# Altium PCB Copy of SoM.PcbDoc (part 6 of 8)
Units mm, origin at the board's own origin, x right, y up, seen from the top; angles counter-clockwise.
Board outline 69.6 x 50 mm, 10 copper layers ([1] Signal HS-H, [2] GND, [3] Signal HS-V, [4] Signal H, [5] GND, [6] POWER, [7] Signal V, [8] Signal HS-H, [9] GND, [10] Signal HS-V), stack 1.146 mm thick; 537 components, 516 nets, 5689 pads, 981 vias.
Unrouted connection lines stored in the file: 963.
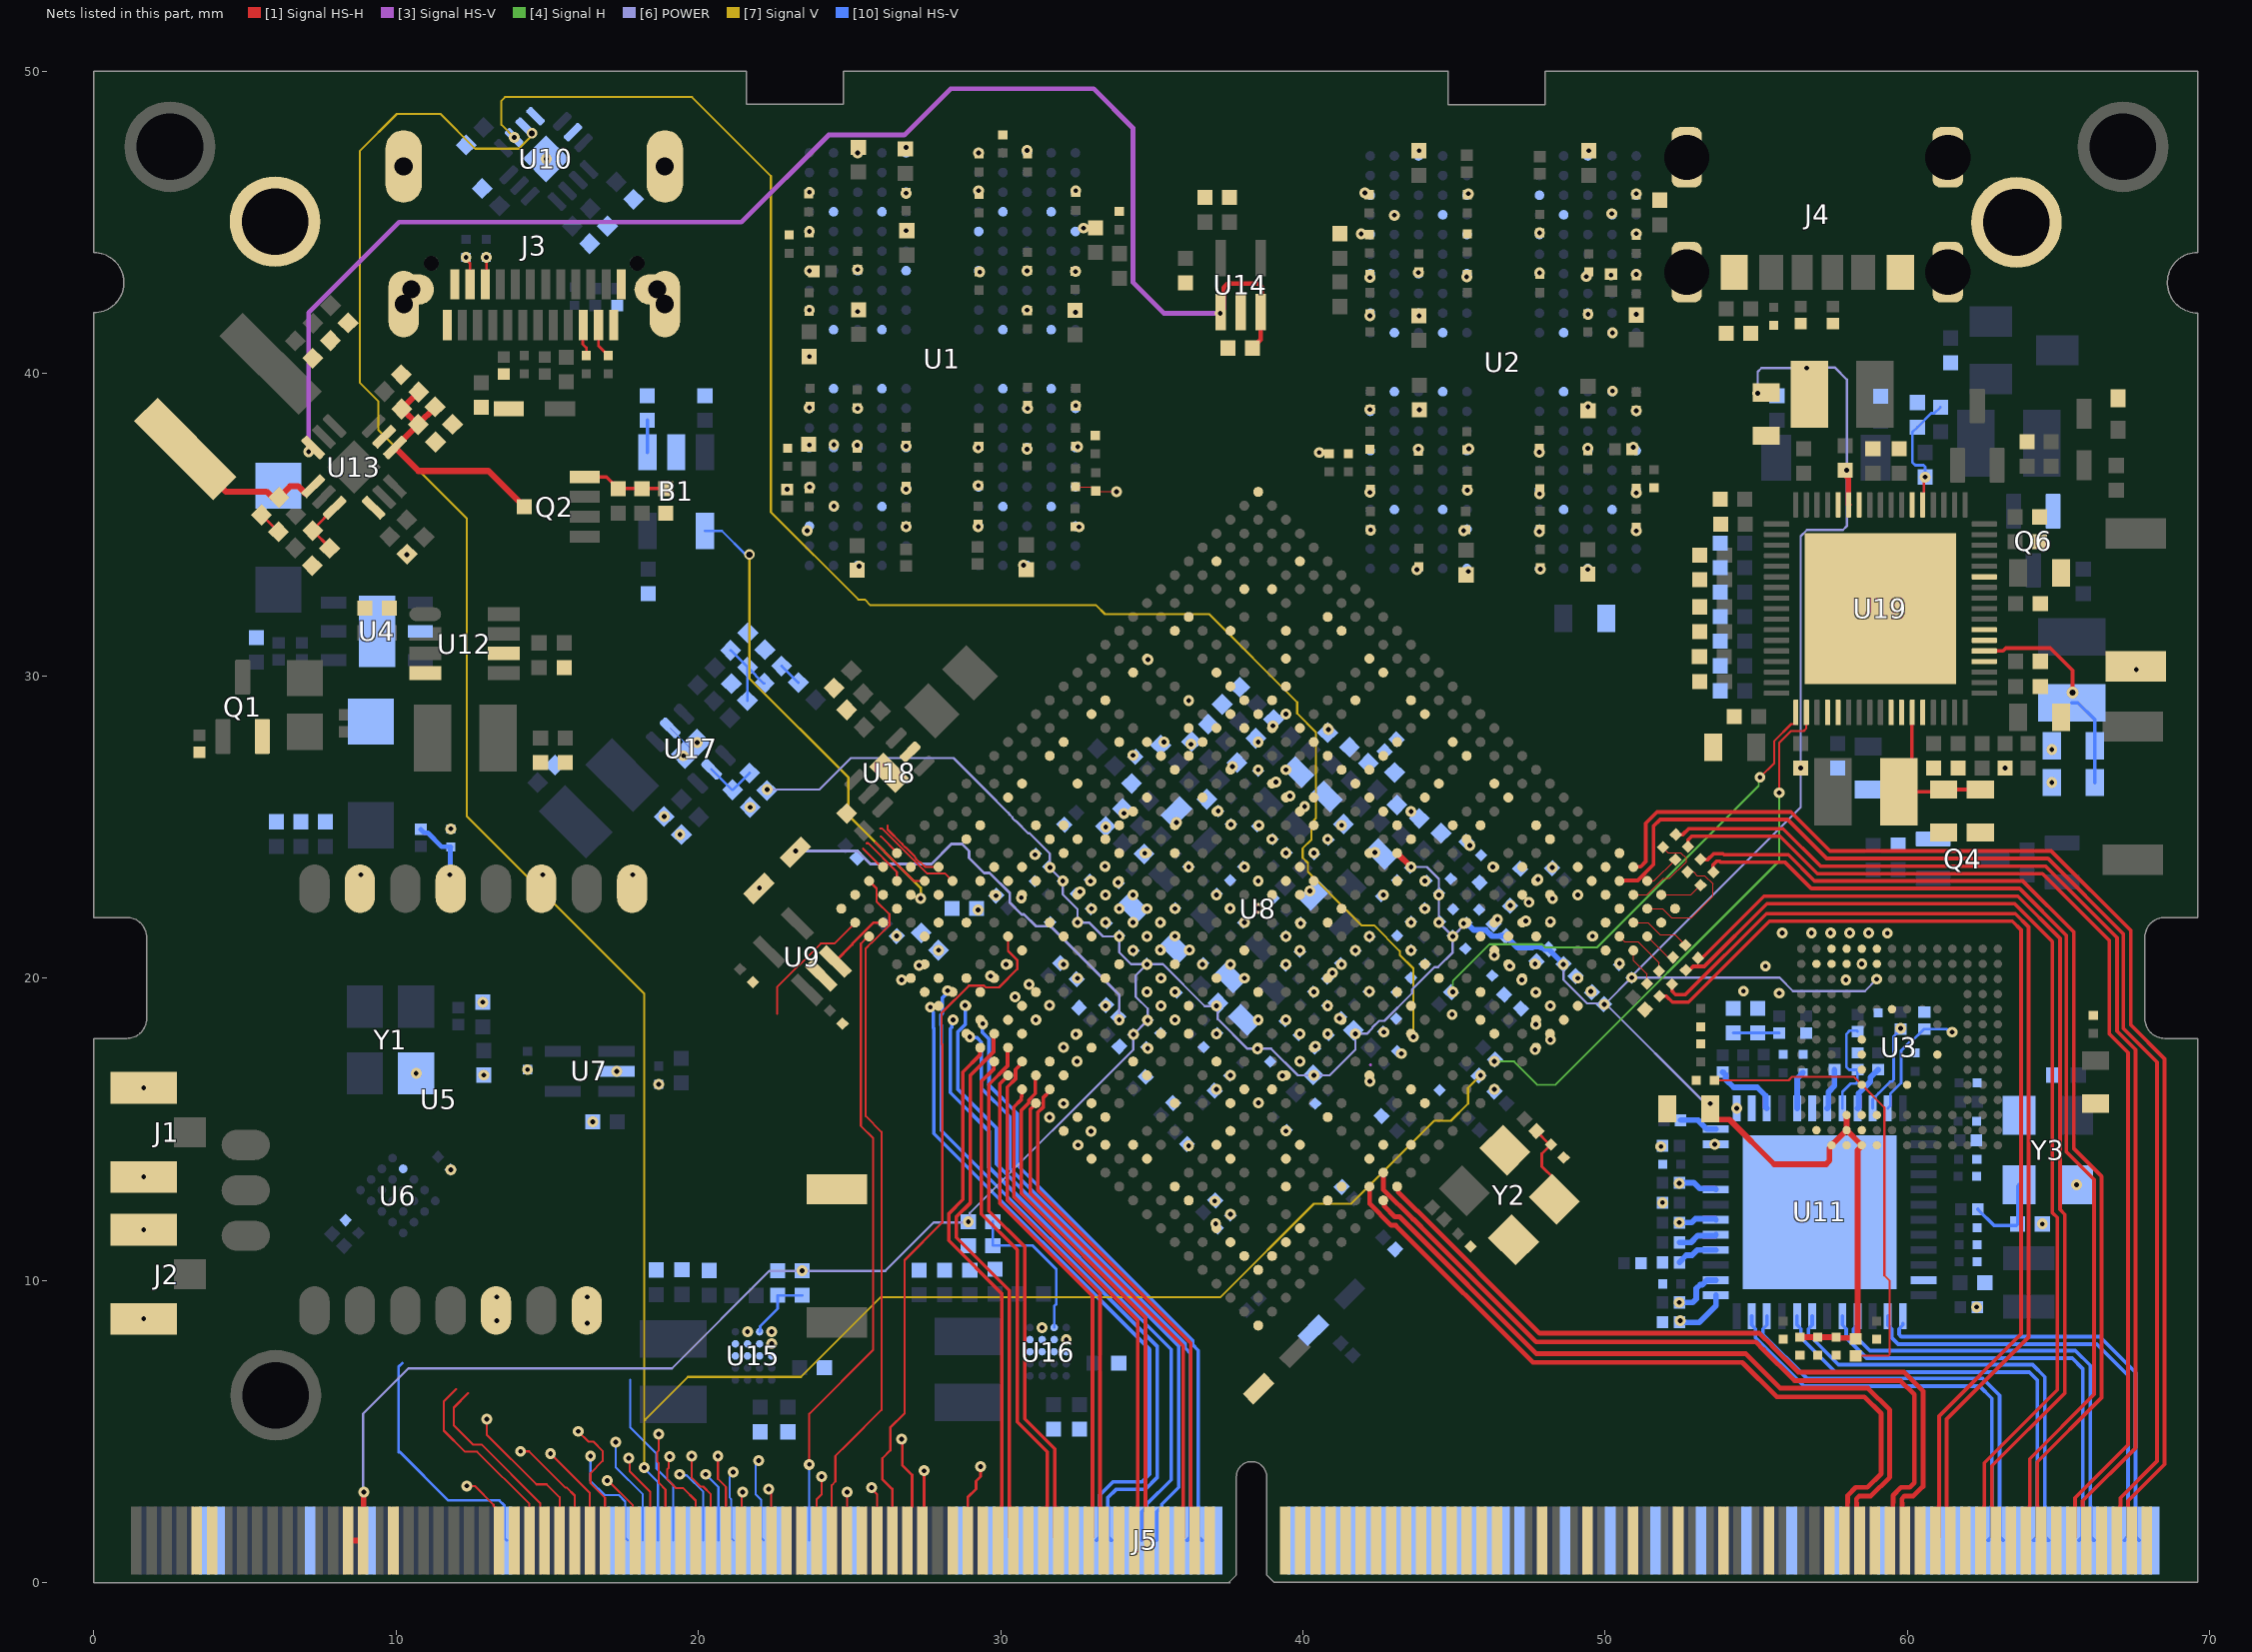
[diagram p11: the nets of this part, all layers, seen from the top]

## Via types
v1: diameter 0.36, hole 0.16, [1] Signal HS-H to [10] Signal HS-V, 895 vias
v2: diameter 0.35, hole 0.16, [1] Signal HS-H to [10] Signal HS-V, 22 vias
v3: diameter 0.4, hole 0.2, [1] Signal HS-H to [10] Signal HS-V, 13 vias
v4: diameter 0.35, hole 0.15, [1] Signal HS-H to [10] Signal HS-V, 12 vias
v5: diameter 0.35, hole 0.15, [1] Signal HS-H to [8] Signal HS-H, 11 vias
v6: diameter 0.35, hole 0.2, [1] Signal HS-H to [8] Signal HS-H, 6 vias
v7: diameter 0.5, hole 0.25, [1] Signal HS-H to [10] Signal HS-V, 6 vias
v8: diameter 0.35, hole 0.15, [3] Signal HS-V to [10] Signal HS-V, 6 vias
v9: diameter 0.35, hole 0.2, [3] Signal HS-V to [10] Signal HS-V, 4 vias
v10: diameter 0.36, hole 0.16, [1] Signal HS-H to [3] Signal HS-V, 4 vias
v11: diameter 0.5, hole 0.25, [1] Signal HS-H to [8] Signal HS-H, 2 vias

## Nets (pads, with @x,y where several pads share a name; then routed paths per layer and width w, separated by ;. In a path a pad name is that pad's centre, name@x,y a point inside that pad or via, vN(x,y) a via of type N, cw(c..) or ccw(c..) an arc to the next point about the centre after c; other vN are vias at no path point) (continued)
EDP_AVDD_1V8: C105.2 C106.2 C107.2 C188.2 C193.2 C203.2 C204.2 C205.2 C208.2 C211.2 C214.2 C217.2 C219.2 C220.2 C221.2 C222.2 C225.2 C227.2 C318.2 FB7.2 FB9.1 FB10.1 J5.29 J5.31 L8.2 R9.2 R42.2 R43.2 R44.2 R45.2 R105.2 R106.2 R109.1 R124.2 R126.2 U3.C6 U3.M4 U3.N4 U3.P3 U3.P5 U8.AA18 U8.AA21 U8.AB8 U8.AB12 U8.AB14 U8.AC10 U8.AD16 U8.J19 U8.J20 U8.J22 U8.J24 U8.K23 U8.K24 U8.U24 U8.Y24 U19.63 | length 139.2
  [1] Signal HS-H w0.192: J5.29@8.415,1.397 J5.31@8.915,1.397 8.928,1.41 8.928,2.984 v1(8.941,2.997) ; U8.J19@43.116,24.135 v1(43.576,23.675) ; C105.2@53.467,15.672 53.467,15.522 53.671,15.318 54.11,15.318 55.585,13.843 57.302,13.843 57.415,13.956 57.415,14.376 57.484,14.445 U3.P3@57.484,14.469 U3.N4@57.984,14.969 ; C222.2@56.439,8.123 C107.2@57.023,8.123 C106.2@57.633,8.123 57.661,8.095 58.255,8.095 R9.2@58.282,8.067 58.344,8.129 58.344,14.305 58.484,14.445 U3.P5@58.484,14.469 U3.N4@57.984,14.969 ; U3.M4@57.984,15.469 U3.N4@57.984,14.969 ; v1(57.988,36.805) 57.988,36.601 58.04,36.549 58.04,35.67 U19.63@58.052,35.659 ; v1(58.979,19.964) U3.C6@58.984,19.969
  [6] POWER w0.077: v1(8.941,2.997) 8.915,3.023 8.915,5.588 10.414,7.087 19.126,7.087 22.355,10.316 v1(23.432,10.316) 26.191,10.316 27.788,11.913 28.905,11.913 v1(28.931,11.938) 28.985,11.992 28.985,12.227 34.392,17.634 34.392,18.133 34.861,18.602 v1(34.865,18.602) 34.865,18.988 34.471,19.383 34.471,20.085 v1(34.843,20.458) ; v1(22.276,26.238) 24.003,26.238 25.044,27.28 26.975,27.28 28.441,27.28 29.483,26.238 30.257,25.465 30.278,25.443 30.278,25.424 30.385,25.317 ccw(c30.709,25.502) 30.524,25.178 30.912,24.79 30.956,24.79 31.632,24.115 v1(31.632,23.664) ; v1@31.618,23.65 32.056,23.212 v1(32.056,23.21) 32.056,22.767 32.545,22.279 v1(32.545,21.836) 32.926,21.836 33.386,21.377 v1(33.924,21.377) 33.924,20.85 34.316,20.458 v1(34.843,20.458) ; v1@37.132,19.07 36.754,19.07 36.754,19.074 35.37,20.458 v1(34.843,20.458) ; v1@37.186,19.016 37.186,18.644 38.167,17.662 v1(38.497,17.662) 38.95,17.662 39.832,16.781 v1(40.359,16.781) 40.885,16.781 41.737,17.633 v1(41.737,18.159) 42.112,18.159 42.299,18.347 42.299,18.366 42.518,18.584 42.689,18.584 43.609,19.504 43.609,19.625 44.346,20.362 44.467,20.362 44.955,20.85 v1(44.955,21.377) ; v1(43.576,23.675) 44.103,23.675 44.495,23.283 v1(44.495,22.756) v1(44.495,21.836) v1(44.955,21.377) ; v1@45.414,21.836 v1(44.955,21.377) ; v1(48.616,20.447) 48.616,19.947 49.397,19.166 v1@49.951,19.166 ; v1(49.962,19.126) 49.974,19.126 v1@50.006,19.158 ; v1@50.851,20.041 56.464,25.654 v1(56.464,26.949) 56.464,34.62 56.667,34.823 57.861,34.823 57.988,34.95 57.988,36.754 57.963,36.779 v1(57.988,36.805) 57.988,39.802 57.588,40.202 56.686,40.202 v1(56.667,40.183) 55.169,40.183 55.042,40.056 v1(55.042,39.345) ; v1(53.467,15.85) 53.413,15.904 53.26,15.904 v1@50.006,19.158 ; v1(58.979,19.964) 58.585,19.571 56.209,19.571 55.765,20.015 v1(50.876,20.015) 50.863,20.015 v1@50.006,19.158
  [10] Signal HS-V w0.192: C219.2@45.406,21.835 45.653,21.588 46.051,21.588 46.254,21.385 R43.2@46.498,21.385 ; R43.2@46.498,21.392 R43.2@46.705,21.392 47.092,21.006 47.585,21.006 47.632,21.053 47.817,21.053 47.864,21.006 47.939,21.006 47.988,20.957 48.121,20.957 R45.2@48.128,20.95 48.133,20.95 48.616,20.467 R44.2@48.621,20.467 R44.2@48.614,20.46
  other v1: 34.392,18.137 37.141,19.079 45.313,21.811
EDP_TX0_N: C196.2 J5.249 | length 36.5
  [1] Signal HS-H w0.122: C196.2@52.739,24.342 52.739,24.468 52.738,24.469 52.738,24.571 52.86,24.693 55.774,24.693 57.018,23.449 58.323,23.449 64.461,23.449 66.675,21.234 66.675,18.146 67.289,17.532 67.289,4.558 65.54,2.809 65.54,2.532 65.529,2.521 65.529,1.511 J5.249@65.415,1.397
EDP_TX0_P: C195.2 J5.251 | length 37.1
  [1] Signal HS-H w0.122: C195.2@52.333,24.749 52.459,24.749 52.46,24.747 52.561,24.747 52.757,24.942 55.877,24.942 57.122,23.698 58.572,23.698 64.564,23.698 66.925,21.337 66.925,18.249 67.539,17.635 67.539,4.454 65.79,2.705 65.79,2.532 65.801,2.521 65.801,1.511 J5.251@65.915,1.397
EDP_TX1_N: C198.2 J5.243 | length 34.3
  [1] Signal HS-H w0.122: C198.2@53.581,23.501 53.581,23.627 53.565,23.642 53.565,23.744 53.687,23.866 53.788,23.866 53.826,23.828 55.953,23.828 56.815,22.966 57.84,22.966 63.7,22.966 65.253,21.414 65.253,14.252 66.169,13.337 66.169,6.225 64.04,4.096 64.04,2.532 64.029,2.521 64.029,1.511 J5.243@63.956,1.438
EDP_TX1_P: C197.2 J5.245 | length 35
  [1] Signal HS-H w0.122: C197.2@53.146,23.936 53.271,23.936 53.287,23.92 53.388,23.92 53.584,24.115 53.892,24.115 53.929,24.078 56.056,24.078 56.918,23.216 58.09,23.216 63.803,23.216 65.502,21.517 65.502,14.356 66.418,13.44 66.418,6.121 64.29,3.993 64.29,2.532 64.301,2.521 64.301,1.511 J5.245@64.415,1.397
EDP_TX2_N: C200.2 J5.237 | length 34.5
  [1] Signal HS-H w0.123: C200.2@52.663,20.26 52.789,20.26 52.911,20.383 53.276,20.383 55.351,22.458 57.332,22.458 63.542,22.458 64.79,21.209 64.79,12.237 64.949,12.079 64.949,6.374 62.54,3.965 62.54,2.533 62.529,2.521 62.529,1.511 J5.237@62.415,1.397
EDP_TX2_P: C199.2 J5.239 | length 34.4
  [1] Signal HS-H w0.123: C199.2@53.07,20.667 53.11,20.667 53.195,20.667 53.24,20.712 53.252,20.712 54.954,22.414 55.248,22.708 57.582,22.708 63.645,22.708 65.04,21.312 65.04,12.341 65.199,12.182 65.199,6.271 62.79,3.862 62.79,2.533 62.801,2.521 62.801,1.511 J5.239@62.915,1.397
EDP_TX3_N: C202.2 J5.231 | length 34.6
  [1] Signal HS-H w0.122: C202.2@51.8,19.397 51.925,19.397 51.927,19.398 52.028,19.398 52.223,19.203 52.749,19.203 55.431,21.885 63.462,21.885 63.756,21.591 63.756,8.228 61.04,5.513 61.04,2.532 61.029,2.521 61.029,1.511 J5.231@60.915,1.397
EDP_TX3_P: C201.2 J5.233 | length 34.8
  [1] Signal HS-H w0.122: C201.2@52.206,19.803 52.206,19.677 52.204,19.676 52.204,19.575 52.327,19.452 52.646,19.452 55.328,22.134 63.565,22.134 64.005,21.694 64.005,8.125 61.29,5.41 61.29,2.532 61.301,2.521 61.301,1.511 J5.233@61.415,1.397
EDPAUX_N: J5.257 U8.A28 | length 40.8
  [1] Signal HS-H w0.122: U8.A28@50.93,23.675 50.938,23.683 51.17,23.683 51.341,23.854 51.341,25.126 51.713,25.497 56.139,25.497 57.429,24.206 64.746,24.206 67.386,21.566 67.386,18.44 68.5,17.326 68.5,3.916 67.29,2.705 67.29,2.532 67.301,2.521 67.301,1.511 J5.257@67.415,1.397
EDPAUX_P: J5.255 U8.B28 | length 40.9
  [1] Signal HS-H w0.122: U8.B28@50.47,23.215 50.488,23.233 51.073,23.233 51.591,23.751 51.591,25.022 51.816,25.248 56.035,25.248 57.326,23.957 64.643,23.957 67.137,21.463 67.137,18.337 68.251,17.223 68.251,4.019 67.04,2.809 67.04,2.532 67.029,2.521 67.029,1.511 J5.255@66.915,1.397
EFUSE_VQPS_EN_H: U8.AK3 U9.3 | length 2.1
  [1] Signal HS-H w0.09: U9.3@24.535,20.549 25.094,21.109 25.094,21.131 25.799,21.836 U8.AK3@26.11,21.836
EMMC_CLKO: R25.2 U3.M5
EMMC_CMD: U3.M6 U8.J31
EMMC_D0: U3.A3 U8.J28
  other v1: 47.244,19.939 56.82,21.488
EMMC_D1: U3.A4 U8.J29
  other v1: 47.701,19.533 58.08,21.488
EMMC_D2: U3.A5 U8.J30
  other v1: 48.184,19.075 58.709,21.488
EMMC_D3: U3.B2 U8.J25
  other v2: 44.933,18.796
  other v4: 55.296,20.396
EMMC_D4: U3.B3 U8.J26
  other v1: 46.33,20.752 55.856,21.49
EMMC_D5: U3.B4 U8.J27
  other v1: 46.838,20.396 57.45,21.488
EMMC_D6: U3.B5 U8.L31
  other v2: 47.676,17.628 58.484,20.469
EMMC_D7: U3.B6 U8.K30
  other v2: 47.701,18.466 59.334,21.483
EMMC_RSTN: C99.2 R9.1 U3.K5 | length 15.5
  [1] Signal HS-H w0.07: C99.2@53.612,16.619 56.065,16.619 56.185,16.739 58.214,16.739 U3.K5@58.484,16.469 59.233,15.72 59.233,10.16 59.411,9.982 59.411,7.548 59.37,7.507 R9.1@58.282,7.507
EMMC_STRB: U3.H5 U8.K31
  other v2: 48.184,17.958
EN_SYR838: C291.2 R105.1 U15.A2 | length 2.3
  [10] Signal HS-V w0.09: U15.A2@22.028,8.301 22.049,8.322 22.049,8.486 22.626,9.063 C291.2@22.626,9.504 R105.1@23.432,9.504
EN_SYR8382: C299.2 R106.1 U16.A2 | length 5.2
  [10] Signal HS-V w0.09: R106.1@29.743,11.938 C299.2@29.743,11.151 31.064,11.151 31.842,10.373 31.842,9.217 31.772,9.147 U16.A2@31.772,8.439
G2_U1: R1.1 U1.G2
  other v1: 22.936,36.17 24.486,37.643
G2_U2: R5.1 U2.G2
  other v1: 50.19,43.256
G12_U8D: FB6.1 U8.G12
  other v1: 40.843,28.219
G15_U8D: R20.2 U8.G15
GND: B1.2 C1.1 C2.1 C3.1 C4.1 C5.1 C6.1 C7.1 C8.1 C9.1 C10.1 C11.1 C12.1 C13.1 C14.1 C15.1 C16.1 C17.1 C18.1 C19.1 C20.1 C21.1 C22.1 C23.1 C24.1 C25.1 C26.1 C27.1 C28.1 C29.1 C30.1 C31.1 C32.1 C33.1 C34.1 C35.1 C36.1 C37.1 C38.1 C39.1 C40.1 C41.1 C42.1 C43.1 C44.1 C45.1 C46.1 C47.1 C48.1 C49.1 C50.1 C51.1 C52.1 C53.1 C54.1 C55.1 C56.1 C57.1 C58.1 C59.1 C60.1 C61.1 C62.1 C63.1 C64.1 C65.1 C66.1 C67.1 C68.1 C69.1 C70.1 C71.1 C72.1 C73.1 C74.1 C75.1 C76.1 C77.1 C78.1 C79.1 C80.1 C81.1 C82.1 C83.1 C84.1 C85.1 C86.1 C87.1 C88.1 C89.1 C90.1 C91.2 C92.2 C93.1 C94.1 C95.1 C96.2 C97.1 C98.1 C99.1 C100.1 C101.1 C102.1 C103.1 C104.1 C105.1 C106.1 C107.1 C108.1 C109.1 C110.1 C111.1 C112.1 C113.1 C114.1 C116.1 C117.1 C118.1 C119.1 C120.1 C121.1 C122.1 C123.1 C124.1 C125.1 C126.1 C127.1 C128.1 C129.1 C130.1 C131.1 C132.1 C133.1 C134.1 C135.1 C136.1 C137.1 C138.1 C139.1 C140.1 C141.1 C142.1 C143.1 C144.1 C145.1 C146.1 C154.1 C155.1 C156.1 C157.1 C158.1 C159.1 C160.1 C161.1 C162.1 C163.1 C164.1 C165.1 C166.1 C167.1 C168.1 C169.1 C170.1 C171.1 C172.1 C173.1 C174.1 C175.1 C176.1 C177.1 C178.1 C179.1 C180.1 C181.1 C182.1 C183.1 C184.1 C185.1 C186.1 C187.1 C188.1 C189.1 C190.1 C191.1 C192.1 C193.1 C194.1 C203.1 C204.1 C205.1 C206.1 C207.1 C208.1 C209.1 C210.1 C211.1 C212.1 C213.1 C214.1 C215.1 C216.1 C217.1 C218.1 C219.1 C220.1 C221.1 C222.1 C223.1 C224.1 C225.1 C226.1 C227.1 C228.1 C229.1 C230.1 C231.1 C232.1 C233.2 C234.1 C235.1 C236.1 C241.1 C243.1 C245.1 C246.1 C247.1 C248.1 C249.1 C250.1 C251.1 C252.1 C253.1 C254.1 C255.1 C256.1 C257.1 C258.1 C259.1 C260.1 C261.1 C262.1 C263.1 C264.1 C265.1 C266.1 C267.1 C268.1 C270.1 C271.1 C272.1 C273.1 C274.1 C275.1 C277.1 C278.1 C279.1 C280.1 C281.1 C282.1 C283.1 C284.1 C285.1 C286.1 C287.1 C288.1 C289.1 C290.1 C291.1 C292.1 C293.1 C294.1 C295.1 C296.1 C297.1 C298.1 C299.1 C300.1 C301.1 C302.1 C303.1 C304.1 C305.1 C306.1 C307.1 C308.1 C309.1 C310.1 C311.1 C312.1 C313.1 C314.1 C315.1 C316.1 C317.1 C318.1 C319.1 C320.1 C322.1 C323.1 C324.1 C325.1 C326.1 C327.1 C328.2 C329.1 C330.1 C331.1 C332.1 C333.1 C334.1 C335.1 C336.1 C337.1 C338.1 C339.1 C340.1 C341.2 C342.1 C343.2 C344.1 C345.1 C346.1 C347.1 D1.A D2.A D3.A D4.A D7.A J1.1 J1.3 J2.1 J2.3 J3.A1 J3.A12 J3.B1 J3.B12 J3.S1 J3.S2 J3.S3 J3.S4 J4.A12 J4.B12 J4.E1 J4.E2 J4.E3 J4.E4 J5.9 J5.10 J5.11 J5.12 J5.24 J5.32 J5.35 J5.51 J5.64 J5.65 J5.74 J5.83 J5.86 J5.87 J5.92 J5.96 J5.109 J5.110 J5.113 J5.114 J5.119 J5.120 J5.125 J5.126 J5.131 J5.132 J5.137 J5.138 J5.143 J5.144 J5.146 J5.149 J5.152 J5.155 J5.158 J5.161 J5.164 J5.167 J5.170 J5.173 J5.176 J5.179 J5.182 J5.185 J5.188 J5.191 J5.194 J5.197 J5.200 J5.203 J5.206 J5.209 J5.212 J5.217 J5.218 J5.223 J5.224 J5.229 J5.230 J5.235 J5.236 J5.241 J5.242 J5.247 J5.248 J5.253 J5.254 J5.259 J5.260 pad.1@6,45.025 pad.1@63.6,45 Q1.2 Q4.2 Q6.2 R2.1 R6.1 R13.2 R17.1 R18.2 R19.1 R20.1 R26.1 R28.2 R29.2 R30.1 R31.2 R32.2 R33.2 R34.2 R35.2 R37.2 R39.2 R40.2 R41.2 R52.1 R53.1 R64.2 R65.1 R66.1 R75.1 R81.1 R83.1 R85.1 R87.1 R95.1 R99.1 R101.1 R102.1 R103.1 R114.1 R115.1 R116.1 R120.1 R121.1 R131.1 SW2.1 SW3.1 U1.A3 U1.A10 U1.AB3 U1.AB5 U1.AB8 U1.AB10 U1.C1 U1.C5 U1.C8 U1.C12 U1.D2 U1.D4 U1.D9 U1.D11 U1.E1 U1.E5 U1.E8 U1.E12 U1.G1 U1.G3 U1.G5 U1.G8 U1.G10 U1.G12 U1.J1 U1.J3 U1.J10 U1.J12 U1.K2 U1.K4 U1.K9 U1.K11 U1.N2 U1.N4 U1.N9 U1.N11 U1.P1 U1.P3 U1.P10 U1.P12 U1.T1 U1.T3 U1.T5 U1.T8 U1.T10 U1.T12 U1.V1 U1.V5 U1.V8 U1.V12 U1.W2 U1.W4 U1.W9 U1.W11 U1.Y1 U1.Y5 U1.Y8 U1.Y12 U2.A3 U2.A10 U2.AB3 U2.AB5 U2.AB8 U2.AB10 U2.C1 U2.C5 U2.C8 U2.C12 U2.D2 U2.D4 U2.D9 U2.D11 U2.E1 U2.E5 U2.E8 U2.E12 U2.G1 U2.G3 U2.G5 U2.G8 U2.G10 U2.G12 U2.J1 U2.J3 U2.J10 U2.J12 U2.K2 U2.K4 U2.K9 U2.K11 U2.N2 U2.N4 U2.N9 U2.N11 U2.P1 U2.P3 U2.P10 U2.P12 U2.T1 U2.T3 U2.T5 U2.T8 U2.T10 U2.T12 U2.V1 U2.V5 U2.V8 U2.V12 U2.W2 U2.W4 U2.W9 U2.W11 U2.Y1 U2.Y5 U2.Y8 U2.Y12 U3.A6 U3.C4 U3.E7 U3.G5 U3.H10 U3.J5 U3.K8 U3.N2 U3.N5 U3.P4 U3.P6 U4.2 U4.7 U5.5 U5.7 U5.8 U5.10 U5.14 U6.D1 U7.2 U8.A1 U8.A27 U8.A31 U8.AA3 U8.AA5 U8.AA9 U8.AA10 U8.AA11 U8.AA12 U8.AA13 U8.AA14 U8.AA15 U8.AA23 U8.AA26 U8.AA29 U8.AB9 U8.AB10 U8.AB11 U8.AB13 U8.AB15 U8.AB16 U8.AB17 U8.AB19 U8.AB23 U8.AC3 U8.AC11 U8.AC13 U8.AC15 U8.AC16 U8.AC17 U8.AC18 U8.AC20 U8.AC21 U8.AC22 U8.AC23 U8.AC25 U8.AC26 U8.AC29 U8.AD3 U8.AD5 U8.AD10 U8.AD13 U8.AD17 U8.AD21 U8.AD22 U8.AD26 U8.AD29 U8.AE11 U8.AE12 U8.AE14 U8.AE17 U8.AE23 U8.AE27 U8.AF9 U8.AF17 U8.AF18 U8.AF20 U8.AF23 U8.AF24 U8.AF29 U8.AG2 U8.AG29 U8.AH29 U8.AJ5 U8.AJ6 U8.AJ8 U8.AJ9 U8.AJ11 U8.AJ12 U8.AJ14 U8.AJ15 U8.AJ17 U8.AJ18 U8.AJ20 U8.AJ21 U8.AJ23 U8.AJ24 U8.AJ26 U8.AJ27 U8.AJ28 U8.AJ29 U8.AL1 U8.AL31 U8.B5 U8.B31 U8.C8 U8.C9 U8.C11 U8.C12 U8.C14 U8.C15 U8.C17 U8.C18 U8.C20 U8.C21 U8.C23 U8.C24 U8.C26 U8.C28 U8.C29 U8.D5 U8.D29 U8.E2 U8.E4 U8.E7 U8.E12 U8.E15 U8.E18 U8.E21 U8.E24 U8.E31 U8.F8 U8.F15 U8.F18 U8.F20 U8.F21 U8.G5 U8.G9 U8.G18 U8.G27 U8.H3 U8.H9 U8.H10 U8.H11 U8.H12 U8.H13 U8.H15 U8.H16 U8.H17 U8.H18 U8.H19 U8.H26 U8.J3 U8.J6 U8.J7 U8.J8 U8.J9 U8.J10 U8.J21 U8.K8 U8.K9 U8.K10 U8.K12 U8.K14 U8.K16 U8.K18 U8.K20 U8.K22 U8.L3 U8.L6 U8.L8 U8.L11 U8.L12 U8.L13 U8.L14 U8.L15 U8.L16 U8.L20 U8.L22 U8.L27 U8.M3 U8.M8 U8.M10 U8.M16 U8.M23 U8.N8 U8.N13 U8.N14 U8.N15 U8.N16 U8.N17 U8.N19 U8.N21 U8.P3 U8.P6 U8.P7 U8.P8 U8.P10 U8.P11 U8.P12 U8.P16 U8.P17 U8.P19 U8.P21 U8.R3 U8.R5 U8.R6 U8.R14 U8.R15 U8.R16 U8.R18 U8.R21 U8.R23 U8.T8 U8.T10 U8.T16 U8.T18 U8.T19 U8.T21 U8.U3 U8.U8 U8.U11 U8.U12 U8.U14 U8.U15 U8.U16 U8.U19 U8.U21 U8.U22 U8.U23 U8.U29 U8.V3 U8.V5 U8.V8 U8.V10 U8.V17 U8.V23 U8.W8 U8.W9 U8.W13 U8.W17 U8.W18 U8.W19 U8.W21 U8.W22 U8.W23 U8.W30 U8.Y3 U8.Y9 U8.Y10 U8.Y11 U8.Y12 U8.Y13 U8.Y14 U8.Y15 U8.Y16 U8.Y17 U8.Y20 U8.Y23 U8.Y29 U9.2 U10.9 U10.15 U11.47 U11.49 U12.4 U12.6 U13.2 U13.10 U14.2 U15.B2 U15.B3 U15.B4 U15.C1 U15.C2 U15.C3 U15.C4 U16.B2 U16.B3 U16.B4 U16.C1 U16.C2 U16.C3 U16.C4 U17.5 U17.7 U18.5 U18.7 U19.21 U19.22 U19.27 U19.28 U19.30 U19.38 U19.40 U19.41 U19.46 U19.57 U19.62 U19.64 U19.69 Y1.2 Y2.2 Y2.4 Y3.2 Y3.4 | length 2.4
  [1] Signal HS-H w0.037: C42.1@32.475,36.251 33.013,36.251 C45.1@33.148,36.116 33.17,36.093 v1(33.833,36.093)
  [10] Signal HS-V w0.037: U17.5@19.068,28.277 U17.7@19.754,27.591
  other v1: 16.332,8.585 13.335,8.661 1.658,8.728 13.335,9.449 16.332,9.449 1.658,11.678 64.455,11.867 37.116,11.877 65.586,13.162 1.658,13.422 11.812,13.664 36.22,14.453 39.439,14.942 16.51,15.24 38.532,15.875 37.141,16.321 1.658,16.372 18.694,16.489 39.319,16.764 12.903,16.789 37.601,16.781 10.668,16.85 17.297,16.916 14.351,16.972 39.903,17.247 43.256,17.501 34.869,17.674 40.409,17.751 37.141,18.159 39.899,18.159 40.818,18.159 42.672,18.212 35.762,18.619 38.52,18.619 39.439,18.619 41.202,18.67 33.464,19.079 35.303,19.079 40.818,19.079 12.878,19.202 34.843,19.538 35.762,19.538 40.359,19.538 42.197,19.564 57.958,19.944 32.545,19.998 35.303,19.998 38.061,19.998 40.971,20.176 32.085,20.458 36.682,20.458 37.601,20.458 39.439,20.458 41.278,20.458 50.47,20.483 27.948,20.922 34.384,20.917 35.281,20.93 36.246,20.93 39.899,20.917 41.737,20.917 43.576,20.917 34.843,21.377 35.763,21.387 39.439,21.377 42.197,21.377 39.924,21.811 33.464,21.836 34.384,21.836 35.281,21.844 38.061,21.836 43.576,21.836 33.005,22.296 33.924,22.296 34.843,22.296 35.762,22.296 37.592,22.301 38.532,22.301 44.036,22.296 33.464,22.756 34.384,22.756 37.141,22.756 42.657,22.756 32.621,22.857 40.234,22.885 22.022,22.987 33.884,23.165 32.978,23.207 38.52,23.215 44.036,23.215 8.839,23.419 14.859,23.419 17.831,23.419 36.222,23.675 38.061,23.675 33.452,23.698 31.14,24.079 34.768,24.131 39.439,24.135 40.359,24.135 42.375,24.16 45.516,24.391 38.98,24.594 40.818,24.594 19.393,24.75 11.811,24.938 33.477,24.994 38.546,25.054 41.278,25.054 37.619,25.085 35.814,25.146 18.869,25.343 34.087,25.451 43.576,25.513 37.199,25.526 21.711,25.653 40.056,25.679 39.566,26.024 64.77,26.467 39.107,26.483 38.52,26.892 39.439,26.892 63.221,26.949 37.668,27 19.507,27.356 34.382,27.372 64.77,27.559 36.297,27.737 19.964,27.788 35.408,27.813 38.52,27.811 39.005,28.347 39.439,28.731 36.22,29.185 67.564,30.201 34.874,30.531 45.466,33.452 43.764,33.513 47.848,33.53 49.424,33.517 25.324,33.63 30.759,33.655 10.363,34.011 47.823,34.771 23.597,34.798 45.314,34.798 51.025,34.794 42.24,34.823 26.873,34.93 29.261,34.931 32.588,34.925 24.486,35.611 47.828,36.017 51.025,36.048 42.215,36.068 45.441,36.144 26.873,36.175 23.686,36.249 29.261,36.297 40.538,37.389 47.822,37.395 30.873,37.495 43.822,37.503 45.491,37.516 29.261,37.541 49.424,37.529 32.551,37.573 50.927,37.567 26.873,37.592 23.678,37.635 25.254,37.63 51.029,38.764 43.848,38.797 42.215,38.811 25.273,38.841 30.886,38.841 23.673,38.866 49.428,38.896 32.487,38.942 50.241,39.421 23.673,40.564 50.241,41.351 42.218,41.904 43.84,41.91 49.428,41.961 51.029,41.961 32.475,42.024 25.275,42.049 23.675,42.1 30.875,42.1 42.215,43.175 45.415,43.201 49.378,43.205 51.029,43.282 43.815,43.337 47.828,43.332 29.312,43.358 32.475,43.375 23.675,43.4 30.875,43.4 25.273,43.439 41.924,44.621 51.029,44.628 23.675,44.7 26.875,44.725 32.746,44.812 43.028,45.237 50.216,45.288 45.466,45.949 51.029,45.949 26.875,45.965 42.047,45.976 23.675,46 29.275,46.051 32.487,46.05 14.969,47.102 25.275,47.3 29.275,47.3 30.875,47.376 43.84,47.371 49.454,47.371 26.875,47.478
  other v2: 47.828,44.653
GPIO0_A6/PWM3A_IR: J5.49 U8.P25 | length 2.4
  [1] Signal HS-H w0.07: v1(12.344,3.2) 12.607,3.2 13.228,2.579 13.228,2.534 13.415,2.347 J5.49@13.415,1.397
GPIO0_B5/LED1_OUT: R93.1 U8.P24
GPIO1_A2_CC_INT_L: U8.R26 U10.5 | length 55.8
  [7] Signal V w0.07: v1(13.909,47.809) 13.487,48.23 13.487,49.022 13.61,49.145 19.791,49.145 22.403,46.533 22.403,35.413 25.292,32.524 25.507,32.524 25.697,32.334 33.161,32.334 33.454,32.041 36.894,32.041 39.808,29.127 39.808,28.754 40.425,28.138 40.425,25.28 40.284,25.14 40.284,24.587 39.99,24.292 39.99,23.982 40.164,23.807 40.164,23.513 41.932,21.746 42.35,21.746 43.203,20.893 43.203,20.768 43.652,20.319 v1(43.652,18.058)
GPIO1_B5_TP_RST: J5.82 U8.M24
GPIO1_C4_TP_INT: J5.84 U8.M29 | length 2.8
  [10] Signal HS-V w0.07: v1(21.996,4.039) 21.996,3.993 21.897,3.893 21.897,2.921 22.086,2.732 22.086,1.476 J5.84@22.165,1.397
GPIO2_B3_CIF_CLKOUTA: J5.111 U8.H31 | length 2.7
  [1] Signal HS-H w0.09: J5.111@28.981,1.463 J5.111@28.915,1.397 28.915,2.829 29.185,3.099 29.185,3.354 29.337,3.507 v1(29.337,3.835)
GPIO4_C0/I2C3_SDA: J5.68 U8.AG6 | length 3.6
  [10] Signal HS-V w0.07: v1(17.272,4.648) 17.272,3.81 18.165,2.917 J5.68@18.165,1.397
GPIO4_C1/I2C3_SCL: J5.66 U8.AL2 | length 7.9
  [1] Signal HS-H w0.07: 22.606,18.821 22.606,19.698 24.052,21.144 24.499,21.144 U8.AL2@25.191,21.836
  [10] Signal HS-V w0.07: v1(16.434,4.191) 16.434,3.367 16.906,2.896 17.374,2.896 17.586,2.683 17.586,1.476 J5.66@17.665,1.397
GPIO4_C5/SPDIF_TX: J5.50 U8.AK1 | length 8.4
  [10] Signal HS-V w0.09: 10.211,7.264 10.084,7.137 10.084,4.318 10.138,4.318 11.735,2.721 13.422,2.721 13.586,2.557 13.586,1.476 J5.50@13.665,1.397
GPIO4_C6/PWM1: J5.90 U8.AL3 | length 21.2
  [1] Signal HS-H w0.07: v1(23.673,3.912) 23.673,5.588 25.781,7.696 25.781,14.707 25.379,15.109 25.379,21.137 25.619,21.377 U8.AL3@25.651,21.377
  [10] Signal HS-V w0.07: J5.90@23.665,1.397 23.669,1.401 23.669,3.908 v1(23.673,3.912)
GPIO4_D0_PCB0: R47.1 R52.2 U8.AE6
  other v1: 29.253,22.258 29.85,22.728
GPIO4_D1_PCB1: R48.1 R53.2 U8.AK4
  other v1: 26.563,21.392
GPIO4_D2: B1.4 U8.AH3 | length 15.5
  [7] Signal V w0.082: v9(21.692,34.011) 21.692,29.909 24.968,26.632 24.968,25.374 27.356,22.987 v1(27.356,22.631)
  [10] Signal HS-V w0.082: B1.4@20.219,34.793 20.782,34.793 21.565,34.011 v9(21.692,34.011)
GPIO4_D5_LCD_BL_EN: J5.78 U8.AJ3 | length 2.4
  [10] Signal HS-V w0.07: v1(20.244,3.581) 20.665,3.16 J5.78@20.665,1.397
GPIO4_D6_LCD_RST_H: J5.80 U8.AG4 | length 2.4
  [10] Signal HS-V w0.07: v1(21.158,3.658) 21.158,3.612 21.033,3.487 21.033,2.819 21.086,2.767 21.086,1.476 J5.80@21.165,1.397
GPU_SLEEP: U8.M25 U15.A1 | length 0
  [3] Signal HS-V w0.09: 42.233,17.127 cw(c42.234,17.037) 42.235,17.127
  other v1: 22.428,8.301
H14_U8D: FB5.1 U8.H14
HDMI_CEC: J5.145 U8.AD7
  other v1: 30.683,22.657
HDMI_HPD: D1.K J5.147 R30.2 U8.AE15 | length 14.4
  [6] POWER w0.09: v1(23.216,24.206) 25.262,24.206 25.692,23.776 27.713,23.776 28.37,24.433 28.732,24.433 28.958,24.207 28.958,23.973 29.45,23.481 29.633,23.481 30.304,22.81 30.304,22.5 30.696,22.108 30.777,22.108 31.168,21.717 31.648,21.717 33.924,19.441 v1(33.924,18.619)
HDMI_TX0_N: J5.157 U8.AL17
HDMI_TX0_P: J5.159 U8.AK17
HDMI_TX1_N: J5.163 U8.AL18
  other v1: 32.563,14.478
HDMI_TX1_P: J5.165 U8.AK18
  other v1: 32.995,14.935
HDMI_TX2_N: J5.169 U8.AL19
HDMI_TX2_P: J5.171 U8.AK19
HDMI_TXCLK_N: J5.151 U8.AL16
  other v1: 31.623,15.392
HDMI_TXCLK_P: J5.153 U8.AK16
  other v1: 32.08,15.85
HOST0_D_N: J5.221 U8.AB31 | length 24.8
  [1] Signal HS-H w0.159: U8.AB31@42.657,12.644 42.689,12.611 42.689,12.456 43.04,12.105 43.191,12.105 47.723,7.573 54.648,7.573 55.79,6.431 58.692,6.431 59.411,5.713 59.411,3.488 58.787,2.865 58.401,2.865 58.308,2.772 58.308,2.641 58.319,2.629 58.319,1.493 J5.221@58.415,1.397
HOST0_D_P: J5.219 U8.AB30 | length 25.3
  [1] Signal HS-H w0.159: U8.AB30@42.197,13.104 42.204,13.096 42.204,12.537 42.922,11.819 43.072,11.819 47.605,7.287 54.53,7.287 55.671,6.146 58.573,6.146 59.125,5.594 59.125,3.607 58.669,3.151 58.283,3.151 58.022,2.891 58.022,2.641 58.011,2.629 58.011,1.493 J5.219@57.915,1.397
HOST1_D_N: J5.227 U8.AA31 | length 25.7
  [1] Signal HS-H w0.159: U8.AA31@43.116,13.104 43.149,13.071 43.149,12.915 43.755,12.309 43.771,12.309 47.833,8.248 55.1,8.248 55.524,7.824 55.524,7.821 55.645,7.7 55.647,7.7 56.236,7.112 56.382,6.966 59.885,6.966 60.51,6.34 60.51,3.182 60.193,2.865 59.901,2.865 59.808,2.772 59.808,2.641 59.819,2.629 59.819,1.493 J5.227@59.915,1.397
HOST1_D_P: J5.225 U8.AA30 | length 26.3
  [1] Signal HS-H w0.159: U8.AA30@42.657,13.563 42.664,13.556 42.664,12.996 43.637,12.024 43.653,12.024 44.196,11.481 47.715,7.962 54.981,7.962 55.238,7.706 55.238,7.703 56.236,6.705 56.26,6.68 59.766,6.68 60.225,6.222 60.225,3.301 60.075,3.151 59.783,3.151 59.522,2.891 59.522,2.641 59.511,2.629 59.511,1.493 J5.225@59.415,1.397
HP_DET_H: J5.76 U8.AH5 | length 2.6
  [10] Signal HS-V w0.07: v1(19.38,3.581) 19.412,3.549 19.616,3.549 20.165,3 J5.76@20.165,1.397
I2C1_SCL: J5.53 R62.1 U8.Y6 | length 6.6
  [1] Signal HS-H w0.07: 11.989,6.401 11.582,5.994 11.582,5.029 12.281,4.331 12.687,4.331 14.415,2.603 J5.53@14.415,1.397
I2C1_SDA: J5.55 R61.1 U8.AG1 | length 7.3
  [1] Signal HS-H w0.07: 12.395,6.274 11.913,5.791 11.913,5.202 12.543,4.572 12.827,4.572 14.775,2.624 14.775,1.537 J5.55@14.915,1.397 ; 26.035,24.689 26.57,24.154 U8.AG1@26.57,24.135
I2C2_SCL: J5.59 R43.1 U8.H25 | length 3.9
  [1] Signal HS-H w0.07: v1(14.122,4.343) 14.402,4.343 15.596,3.15 15.646,3.15 15.915,2.881 J5.59@15.915,1.397
  other v1: 46.435,21.938
I2C2_SDA: J5.57 R42.1 U8.G31 | length 5.2
  [1] Signal HS-H w0.07: v1(13.005,5.41) 13.005,4.891 14.645,3.251 14.986,3.251 15.415,2.822 J5.57@15.415,1.397
  other v1: 49.526,19.564
I2C4_TPSCL: J5.70 R59.1 U8.P30 U10.6 | length 89.7
  [7] Signal V w0.07: v9(14.497,47.95) 14.497,47.876 14.061,47.44 12.619,47.44 11.472,48.587 10.029,48.587 8.8,47.357 8.8,39.7 9.423,39.077 9.423,38.125 12.344,35.204 12.344,25.349 18.212,19.482 18.212,5.385 ; v1(18.212,3.81) 18.212,5.385 ; v1(45.874,16.781) 45.463,16.37 45.463,15.848 44.894,15.279 44.336,15.279 41.593,12.536 40.362,12.536 37.276,9.449 26.035,9.449 23.393,6.807 19.66,6.807 18.237,5.385 18.212,5.385
  [10] Signal HS-V w0.07: v1(18.212,3.81) 18.212,3.782 18.665,3.329 J5.70@18.665,1.397
I2C4_TPSDA: J5.72 R60.1 U8.P31 U10.7 | length 5.9
  [10] Signal HS-V w0.07: 17.755,6.706 17.755,5.131 18.618,4.267 18.618,3.774 19.165,3.227 J5.72@19.165,1.397
  other v1: 46.334,16.321
I2C7_SCL_HDMI: J5.61 R45.1 U8.H28 | length 3.4
  [1] Signal HS-H w0.07: v1(15.113,4.267) 16.415,2.965 J5.61@16.415,1.397
  other v1: 47.676,20.472
I2C7_SDA_HDMI: J5.63 R44.1 U8.G30 | length 4.4
  [1] Signal HS-H w0.07: v1(16.027,5.004) 16.367,4.665 16.53,4.665 16.837,4.358 16.837,4.024 16.434,3.621 16.434,3.29 16.915,2.809 J5.63@16.915,1.397
  other v1: 49.091,19.998
I2C_SCL_PMIC: R57.1 U8.N30 U15.A3 U16.A3 U19.19 | length 18.3
  [1] Signal HS-H w0.07: v5(55.753,26.137) 55.753,27.78 56.147,28.174 56.562,28.174 56.652,28.264 U19.19@56.652,28.789
  [4] Signal H w0.07: v1(46.334,17.24) 46.987,17.24 47.765,16.463 48.34,16.463 55.753,23.876 v5(55.753,26.137)
  other v1: 21.628,8.301 31.372,8.439
I2C_SDA_PMIC: R58.1 U8.M26 U15.B1 U16.B1 U19.18 | length 16.2
  [1] Signal HS-H w0.07: v5(55.118,26.638) 55.593,27.113 55.593,27.846 56.15,28.404 56.252,28.404 56.302,28.454 U19.18@56.302,28.789
  [4] Signal H w0.07: v1(44.955,19.538) 44.955,19.899 46.177,21.121 47.904,21.121 48.007,21.018 49.734,21.018 53.042,24.326 55.073,26.358 55.073,26.593 v5(55.118,26.638)
  other v1: 22.428,7.901 32.172,8.039
I2S0_LRCK_RX: J5.69 U8.AF4 | length 6.1
  [1] Signal HS-H w0.07: v1(17.704,4.115) 17.736,4.083 17.736,3.676 18.415,2.997 J5.69@18.415,1.397 ; 26.01,24.943 26.086,24.943 27.564,23.465 28.159,23.465 U8.AF4@28.409,23.215
I2S0_LRCK_TX: J5.71 U8.AJ2 | length 3.6
  [1] Signal HS-H w0.07: v1(18.694,4.911) 18.694,4.597 18.694,4.379 18.647,4.332 18.647,3.999 18.694,3.952 18.694,3.3 18.915,3.079 J5.71@18.915,1.397
I2S0_SCLK: J5.67 U8.AG3 | length 4.5
  [1] Signal HS-H w0.07: v1(16.993,3.378) 17.015,3.378 17.836,2.557 17.836,1.476 J5.67@17.915,1.397 ; 25.857,24.486 27.128,23.215 U8.AG3@27.489,23.215
I2S0_SDI0: J5.73 U8.Y7
I2S0_SDI1SDO3: J5.75 U8.AE5 | length 3.3
  [1] Signal HS-H w0.07: v1(19.05,4.166) 19.018,4.133 19.018,3.788 18.977,3.748 18.977,3.415 19.268,3.124 19.507,3.124 19.915,2.716 J5.75@19.915,1.397
I2S0_SDI2SDO2: J5.77 U8.AA6 | length 3.1
  [1] Signal HS-H w0.07: v1(19.787,4.191) 19.787,3.469 20.077,3.179 20.164,3.179 20.415,2.928 J5.77@20.415,1.397
I2S0_SDI3SDO1: J5.79 U8.AH2 | length 4.6
  [1] Signal HS-H w0.07: v1(20.65,4.191) 20.65,3.432 20.915,3.167 J5.79@20.915,1.397 ; 25.578,24.46 25.622,24.46 26.57,23.512 U8.AH2@26.57,23.215
I2S0_SDO0: J5.81 U8.AH1 | length 2.5
  [1] Signal HS-H w0.07: J5.81@21.415,1.397 21.439,1.421 21.439,2.973 v1(21.463,2.997) ; 25.451,24.282 26.058,23.675 U8.AH1@26.11,23.675
I2S1_LRCK_RX: J5.91 U8.AA7 | length 2.2
  [1] Signal HS-H w0.07: J5.91@23.915,1.397 23.915,2.757 24.079,2.921 v1(24.079,3.505)
I2S1_LRCK_TX: J5.93 U8.AJ1 | length 23.3
  [1] Signal HS-H w0.07: J5.93@24.415,1.397 24.415,3.225 24.536,3.347 24.536,4.191 24.943,4.597 26.06,5.715 26.06,14.91 25.539,15.431 25.539,18.835 25.539,20.981 25.725,21.167 25.738,21.167 26.32,21.749 26.32,22.112 25.9,22.532 25.9,22.966 U8.AJ1@25.651,23.215
I2S1_SCLK: J5.89 U8.AF3 | length 2.3
  [1] Signal HS-H w0.07: 26.264,25.044 26.264,24.917 26.737,24.444 ccw(c27.051,24.638) 26.857,24.324 27.159,24.022 27.189,23.97 ccw(c27.508,24.155) 27.366,23.815 27.506,23.675 U8.AF3@27.949,23.675
I2S1_SDI0: J5.95 U8.AD6 | length 1.6
  [1] Signal HS-H w0.07: J5.95@24.915,1.397 24.92,1.402 24.92,2.991 v1(24.925,2.996)
I2S1_SDO0: J5.97 U8.AC6
I2S_CLK: J5.85 U8.AC7 | length 1.7
  [1] Signal HS-H w0.07: v1(22.327,3.099) 22.327,3.053 22.415,2.965 J5.85@22.415,1.397
LAN_LED0_AD0: J5.232 R80.1 U11.34 | length 3
  [10] Signal HS-V w0.09: U11.34@58.844,15.692 58.844,15.992 59.042,16.19 59.042,16.193 59.422,16.574 59.474,16.574 59.538,16.637 59.538,18.075 59.615,18.152 59.615,18.162 59.76,18.307 R80.1@59.77,18.307
  other v1: 59.766,18.339
LAN_LED0_AD1: J5.234 R83.2 U11.35 | length 4.1
  [10] Signal HS-V w0.09: U11.35@59.344,15.692 59.429,15.777 59.429,16.176 59.784,16.531 59.784,17.6 60.068,17.884 60.115,17.884 60.544,18.313 R83.2@60.554,18.313 61.294,18.313 61.395,18.212 v1(61.468,18.212)
LDO: C284.2 U13.6 U14.1 U14.3 | length 48.2
  [1] Signal HS-H w0.16: U14.1@37.283,42.037 37.381,42.135 37.381,42.842 37.516,42.977 38.532,42.977 38.633,42.875 38.633,42.066 U14.3@38.604,42.037 38.604,41.119 C284.2@38.329,40.843
  [3] Signal HS-V w0.16: v1(7.112,37.414) 7.112,42.012 10.109,45.009 21.428,45.009 24.311,47.892 26.817,47.892 28.346,49.422 33.078,49.422 34.374,48.125 34.374,43.02 35.408,41.986 v1(37.262,41.986)
LED2_RXDLY: R85.2 R86.1 U11.32 | length 3.5
  [10] Signal HS-V w0.09: U11.32@57.844,15.692 57.844,16.239 58.115,16.51 58.291,16.51 58.344,16.563 R85.2@58.344,16.967 58.066,16.967 57.972,17.062 57.972,18.145 58.09,18.263 58.318,18.263 R86.1@58.344,18.237
LOG_DVS_PWM: R117.1 R119.2 U8.M28 | length 0.8
  [10] Signal HS-V w0.09: R117.1@22.757,30.324 22.763,30.324 R119.2@23.309,29.778
M7_U8E: FB4.1 U8.M7
MAC_COL: R84.1 U8.D27 U11.33 | length 1.6
  [10] Signal HS-V w0.191: U11.33@58.344,15.692 58.378,15.726 58.378,16.189 58.767,16.577 58.767,16.714 59.02,16.967 R84.1@59.03,16.967
  other v1: 49.091,22.756
MAC_CRS: C255.2 R73.1 U8.B27 U11.29 | length 1.3
  [10] Signal HS-V w0.191: U11.29@56.344,15.692 56.344,16.674 C255.2@56.54,16.87
  other v4: 55.753,19.507
MAC_MCLK: R54.2 R74.1
  other v1: 62.281,9.119
  other v2: 46.863,22.403
MAC_MDC: U8.E29 U11.30
  other v1: 49.581,21.387
  other v4: 54.571,19.565
MAC_MDIO: R71.1 U8.G26 U11.31 | length 1.4
  [10] Signal HS-V w0.191: U11.31@57.344,15.692 57.378,15.726 57.378,16.23 57.582,16.434 R71.1@57.582,16.967
  other v1: 47.371,21.895
MAC_RXCLK: R76.1 U8.F25
  other v1: 51.892,12.573
  other v2: 47.473,22.504
MAC_RXD0: R88.1 U8.E26 U11.14 | length 1.7
  [10] Signal HS-V w0.191: v1(52.451,9.271) 52.894,9.271 53.006,9.383 53.006,9.729 53.137,9.86 53.212,9.86 53.359,10.007 U11.14@53.659,10.007
  other v1: 48.258,22.627
MAC_RXD1: R81.2 R82.1 U8.F27 U11.16 | length 1.4
  [10] Signal HS-V w0.191: R81.2@52.452,10.592 52.452,10.602 52.679,10.829 52.866,10.829 53.044,11.007 U11.16@53.659,11.007
  other v2: 48.184,21.869
MAC_RXD2: R89.1 U8.E30 U11.17 | length 1.3
  [10] Signal HS-V w0.191: R89.1@52.452,11.252 52.832,11.252 53.061,11.481 53.633,11.481 U11.17@53.659,11.507
MAC_RXD3: R91.1 U8.E25 U11.18 | length 1.3
  [10] Signal HS-V w0.191: v1(52.452,11.913) 52.857,11.913 52.984,12.04 53.627,12.04 U11.18@53.659,12.007
  other v1: 47.777,23.266
MAC_RXDV: R87.2 U8.C27 U11.13 | length 1.8
  [10] Signal HS-V w0.191: R87.2@52.452,8.611 53.111,8.611 53.659,9.158 U11.13@53.659,9.507
  other v1: 52.476,8.661
MAC_RXER: R72.1 U8.F23 U11.20 | length 1.3
  [10] Signal HS-V w0.191: R72.1@52.452,13.233 52.929,13.233 53.121,13.041 53.625,13.041 U11.20@53.659,13.007
  other v1: 52.451,13.208 46.279,23.673
MAC_TXCLK: R56.2 R79.1
  other v1: 51.841,14.427
MAC_TXD0: R50.2 U11.23
  other v1: 53.619,14.503 48.247,23.665
MAC_TXD1: R51.1 U11.24 | length 1.3
  [10] Signal HS-V w0.191: R51.1@52.494,15.301 53.065,15.301 53.359,15.007 U11.24@53.659,15.007
MAC_TXD2: R46.2 U11.25
  other v1: 54.344,15.692
MAC_TXD3: R49.1 U11.26
MAC_TXEN: R55.1 U11.27 | length 2.3
  [10] Signal HS-V w0.191: R55.1@53.88,16.89 53.89,16.89 53.984,16.796 53.984,16.644 54.244,16.383 55.028,16.383 55.31,16.101 55.31,15.726 U11.27@55.344,15.692
MDI0_N: J5.256 U11.2 | length 14.6
  [10] Signal HS-V w0.122: U11.2@59.344,8.822 59.344,8.522 59.47,8.397 59.47,8.105 59.687,7.888 66.255,7.888 67.29,6.852 67.29,2.532 67.279,2.521 67.279,1.511 J5.256@67.165,1.397
MDI0_P: J5.258 U11.1 | length 14.4
  [10] Signal HS-V w0.122: U11.1@59.844,8.573 59.844,8.522 59.719,8.397 59.719,8.209 59.791,8.137 66.358,8.137 67.54,6.956 67.54,2.532 67.551,2.521 67.551,1.511 J5.258@67.665,1.397
MDI1_N: J5.250 U11.5 | length 14.8
  [10] Signal HS-V w0.122: U11.5@57.844,8.822 57.844,8.522 57.97,8.397 57.97,8.105 58.649,7.426 65.446,7.426 65.79,7.082 65.79,2.532 65.779,2.521 65.779,1.511 J5.250@65.665,1.397
MDI1_P: J5.252 U11.4 | length 14.8
  [10] Signal HS-V w0.122: U11.4@58.344,8.822 58.344,8.522 58.219,8.397 58.219,8.209 58.752,7.675 65.55,7.675 66.04,7.186 66.04,2.532 66.051,2.521 66.051,1.511 J5.252@66.165,1.397
MDI2_N: J5.244 U11.8 | length 14.5
  [10] Signal HS-V w0.122: U11.8@56.344,8.822 56.344,8.522 56.47,8.397 56.47,8.105 57.611,6.964 64.029,6.964 64.29,6.703 64.29,2.532 64.279,2.521 64.279,1.511 J5.244@64.165,1.397
MDI2_P: J5.246 U11.7 | length 14.5
  [10] Signal HS-V w0.122: U11.7@56.844,8.822 56.844,8.522 56.719,8.397 56.719,8.209 57.714,7.214 64.132,7.214 64.54,6.806 64.54,2.532 64.551,2.521 64.551,1.511 J5.246@64.665,1.397
MDI3_N: J5.238 U11.11 | length 14.2
  [10] Signal HS-V w0.122: U11.11@54.844,8.822 54.844,8.522 54.97,8.397 54.97,8.105 56.572,6.503 62.382,6.503 62.79,6.094 62.79,2.532 62.779,2.521 62.779,1.511 J5.238@62.665,1.397
MDI3_P: J5.240 U11.10 | length 14.2
  [10] Signal HS-V w0.122: U11.10@55.344,8.822 55.344,8.522 55.219,8.397 55.219,8.209 56.676,6.752 62.485,6.752 63.04,6.198 63.04,2.532 63.051,2.521 63.051,1.511 J5.240@63.165,1.397
MIPI_CSI0_PWM: J5.101 U8.AF8 | length 22.8
  [1] Signal HS-H w0.077: 26.086,4.115 26.348,4.377 26.348,4.597 26.348,5.126 26.822,5.601 26.822,10.668 28.067,11.913 28.067,17.805 28.05,17.823 28.05,18.849 28.953,19.752 29.454,19.752 29.513,19.693 29.949,19.693 30.548,20.293 30.548,20.601 30.247,20.902 U8.AF8@30.247,21.377
  [1] Signal HS-H w0.09: 26.086,4.115 26.086,3.424 26.415,3.095 J5.101@26.415,1.397
MIPI_CSI0_RST: J5.99 U8.AD9 | length 1.8
  [1] Signal HS-H w0.07: v1(25.73,3.15) 25.73,3.104 25.915,2.919 J5.99@25.915,1.397
MIPI_CSI1_PWN: J5.105 U8.V26 | length 2.3
  [1] Signal HS-H w0.09: J5.105@27.415,1.397 27.472,1.454 v1(27.472,3.701)
  other v1: 42.215,16.586
MIPI_CSI1_RST: J5.103 U8.U28 | length 3.6
  [1] Signal HS-H w0.09: v1(26.721,4.75) 26.746,4.724 26.746,3.886 27.069,3.563 27.069,2.501 26.915,2.347 J5.103@26.915,1.397
MIPI_RX0_CLK_N: J5.127 U8.AL13 | length 16.8
  [1] Signal HS-H w0.122: U8.AL13@30.247,16.781 30.247,16.773 29.975,16.501 29.975,12.549 33.04,9.484 33.04,2.532 33.029,2.521 33.029,1.511 J5.127@32.915,1.397
MIPI_RX0_CLK_P: J5.129 U8.AK13 | length 17.4
  [1] Signal HS-H w0.122: U8.AK13@30.707,17.24 30.707,17.184 30.496,16.974 30.496,16.67 30.224,16.398 30.224,12.653 33.29,9.587 33.29,2.532 33.301,2.521 33.301,1.511 J5.129@33.415,1.397
MIPI_RX0_D0_N: J5.139 U8.AL15 | length 16.7
  [1] Signal HS-H w0.123: U8.AL15@31.166,15.861 31.166,15.848 30.978,15.66 30.978,13.396 30.978,12.881 36.04,7.819 36.04,4.597 36.04,4.572 36.04,2.533 36.029,2.521 36.029,1.511 J5.139@35.915,1.397
MIPI_RX0_D0_P: J5.141 U8.AK15 | length 17.2
  [1] Signal HS-H w0.123: U8.AK15@31.626,16.321 31.626,16.265 31.416,16.055 31.416,15.744 31.228,15.556 31.228,13.146 31.228,12.985 36.29,7.922 36.29,4.597 36.29,4.572 36.29,2.533 36.301,2.521 36.301,1.511 J5.141@36.415,1.397
MIPI_RX0_D1_N: J5.133 U8.AL14 | length 16.8
  [1] Signal HS-H w0.123: U8.AL14@30.707,16.321 30.698,16.313 30.698,16.081 30.68,16.063 30.68,15.974 30.437,15.73 30.437,13.937 30.437,12.768 34.54,8.665 34.54,4.597 34.54,2.533 34.529,2.521 34.529,1.511 J5.133@34.415,1.397
MIPI_RX0_D1_P: J5.135 U8.AK14 | length 17.3
  [1] Signal HS-H w0.123: U8.AK14@31.166,16.781 31.149,16.763 31.149,16.178 30.93,15.959 30.93,15.87 30.687,15.627 30.687,13.687 30.687,12.872 34.79,8.769 34.79,4.597 34.79,2.533 34.801,2.521 34.801,1.511 J5.135@34.915,1.397
MIPI_RX0_D2_N: J5.121 U8.AL12 | length 17
  [1] Signal HS-H w0.122: U8.AL12@29.787,17.24 29.78,17.232 29.78,17 29.362,16.583 29.362,12.195 30.548,11.009 30.548,5.317 31.54,4.324 31.54,2.532 31.529,2.521 31.529,1.511 J5.121@31.415,1.397
MIPI_RX0_D2_P: J5.123 U8.AK12 | length 17.5
  [1] Signal HS-H w0.122: U8.AK12@30.247,17.7 30.229,17.682 30.229,17.097 29.612,16.479 29.612,12.298 30.797,11.112 30.797,5.42 31.79,4.428 31.79,2.532 31.801,2.521 31.801,1.511 J5.123@31.915,1.397
MIPI_RX0_D3_N: J5.115 U8.AL11 | length 17.5
  [1] Signal HS-H w0.122: U8.AL11@29.328,17.7 29.32,17.692 29.32,17.459 28.753,16.892 28.753,15.9 28.753,12.675 28.286,12.208 28.286,11.315 30.04,9.561 30.04,2.532 30.029,2.521 30.029,1.511 J5.115@29.915,1.397
MIPI_RX0_D3_P: J5.117 U8.AK11 | length 18.1
  [1] Signal HS-H w0.122: U8.AK11@29.787,18.159 29.77,18.142 29.77,17.557 29.002,16.789 29.002,15.651 29.002,12.571 28.535,12.105 28.535,11.419 30.29,9.665 30.29,2.532 30.301,2.521 30.301,1.511 J5.117@30.415,1.397
MIPI_TX0_CLK_N: J5.160 U8.AH12
  other v1: 31.166,18.618
MIPI_TX0_CLK_P: J5.162 U8.AG12
  other v1: 31.623,19.101
MIPI_TX0_D0_N: J5.172 U8.AH15
  other v1: 32.525,17.247
MIPI_TX0_D0_P: J5.174 U8.AG15
MIPI_TX0_D1_N: J5.166 U8.AH14
  other v1: 32.08,17.704
MIPI_TX0_D1_P: J5.168 U8.AG14
  other v1: 32.487,18.136
MIPI_TX0_D2_N: J5.154 U8.AH11
  other v1: 30.48,19.38
MIPI_TX0_D2_P: J5.156 U8.AG11
  other v1: 30.937,19.787
MIPI_TX0_D3_N: J5.148 U8.AH9
  other v1: 29.667,20.066
MIPI_TX0_D3_P: J5.150 U8.AG9
  other v1: 30.175,20.447
MIPI_TX1/RX1_CLK_N: J5.128 U8.AL8 | length 21.9
  [10] Signal HS-V w0.122: v1(27.675,19.039) 27.675,18.975 27.778,18.872 27.778,18.351 27.792,18.337 27.792,16.582 27.792,14.854 34.927,7.72 34.927,4.597 34.927,3.58 34.678,3.332 33.715,3.332 33.29,2.907 33.29,2.532 33.279,2.521 33.279,1.511 J5.128@33.165,1.397
MIPI_TX1/RX1_CLK_P: J5.130 U8.AK8 | length 22.5
  [10] Signal HS-V w0.122: v1(28.245,19.583) 28.245,19.519 28.07,19.345 28.07,18.825 28.027,18.782 28.027,18.455 28.042,18.44 28.042,16.332 28.042,14.958 35.176,7.823 35.176,4.597 35.176,3.477 34.782,3.082 33.818,3.082 33.54,2.804 33.54,2.532 33.551,2.521 33.551,1.511 J5.130@33.665,1.397
MIPI_TX1/RX1_D0_N: J5.116 U8.AL6
  other v1: 26.721,19.939
MIPI_TX1/RX1_D0_P: J5.118 U8.AK6
  other v1: 27.305,20.422
MIPI_TX1/RX1_D1_N: J5.122 U8.AL7
MIPI_TX1/RX1_D1_P: J5.124 U8.AK7
MIPI_TX1/RX1_D2_N: J5.134 U8.AL9 | length 20.7
  [10] Signal HS-V w0.122: v1(28.423,18.618) 28.391,18.587 28.391,18.38 28.337,18.326 28.337,16.316 28.337,16.215 29.616,14.935 29.616,14.757 29.616,13.741 35.641,7.717 35.641,4.597 35.641,3.405 34.826,2.59 34.826,2.508 34.665,2.347 J5.134@34.665,1.397
MIPI_TX1/RX1_D2_P: J5.136 U8.AK9 | length 21.1
  [10] Signal HS-V w0.122: v1(28.829,19.101) 28.829,18.466 28.586,18.223 28.586,16.318 29.866,15.038 29.866,14.787 29.866,14.508 29.866,13.845 35.89,7.82 35.89,4.597 35.89,3.154 35.326,2.59 35.326,2.508 35.165,2.347 J5.136@35.165,1.397
MIPI_TX1/RX1_D3_N: J5.140 U8.AL10 | length 19.9
  [10] Signal HS-V w0.122: v1(28.981,18.059) 29.013,18.028 29.219,18.028 29.366,17.881 29.366,16.353 30.302,15.416 30.302,14.072 30.302,13.708 36.103,7.908 36.103,7.763 36.29,7.575 36.29,4.597 36.29,2.532 36.279,2.521 36.279,1.511 J5.140@36.165,1.397
MIPI_TX1/RX1_D3_P: J5.142 U8.AK10 | length 20.1
  [10] Signal HS-V w0.122: v1(29.413,18.491) 29.396,18.474 29.396,18.204 29.615,17.985 29.615,16.456 30.552,15.519 30.552,13.812 36.352,8.011 36.352,7.87 36.54,7.682 36.54,4.597 36.54,2.532 36.551,2.521 36.551,1.511 J5.142@36.665,1.397
NetB1_1: B1.1 R64.1 | length 1.1
  [10] Signal HS-V w0.12: R64.1@18.313,38.456 18.313,37.399 B1.1@18.319,37.393
NetC92_1: C92.1 R10.1 U5.12 | length 2.2
  [10] Signal HS-V w0.16: R10.1@10.82,24.918 10.93,24.808 11.053,24.808 11.515,24.346 11.803,24.346 C92.1@11.811,24.338 11.798,24.325 11.798,23.431 v1(11.786,23.419)
NetC180_2: C180.2 R23.1 Y2.3 | length 2.8
  [1] Signal HS-H w0.09: R23.1@47.721,14.94 48.172,14.49 C180.2@48.203,14.49 47.904,14.191 47.904,13.767 48.31,13.361 Y2.3@48.31,12.683
NetC191_2: C191.2 R27.1 U8.AH26
  other v1: 37.601,12.184 37.084,12.624
NetC195_1: C195.1 U8.B29 | length 3.2
  [1] Signal HS-H w0.021: U8.B29@50.93,22.756 51.381,22.756 51.929,23.303 52.132,23.303 52.68,23.851 52.68,23.966 52.495,24.15 52.083,24.15 C195.1@51.909,24.324
NetC196_1: C196.1 U8.A29 | length 1.2
  [1] Signal HS-H w0.021: U8.A29@51.389,23.215 51.612,23.215 C196.1@52.315,23.918
NetC197_1: C197.1 U8.B30 | length 4
  [1] Signal HS-H w0.021: U8.B30@51.389,22.296 51.897,22.296 52.197,21.996 52.857,21.996 53.569,22.708 53.569,23.114 53.289,23.393 53.037,23.393 52.919,23.511 C197.1@52.721,23.511
NetC198_1: C198.1 U8.A30 | length 1.4
  [1] Signal HS-H w0.021: U8.A30@51.849,22.756 52.835,22.756 C198.1@53.156,23.077
NetC199_1: C199.1 U8.C30 | length 2
  [1] Signal HS-H w0.021: U8.C30@50.93,21.836 51.417,21.836 51.816,21.438 52.299,21.438 C199.1@52.645,21.091
NetC200_1: C200.1 U8.C31 | length 1.1
  [1] Signal HS-H w0.021: U8.C31@51.389,21.377 52.082,20.685 C200.1@52.239,20.685
NetC201_1: C201.1 U8.D30 | length 2
  [1] Signal HS-H w0.021: U8.D30@50.47,21.377 50.638,21.209 51.079,21.209 51.782,20.507 C201.1@51.782,20.227
NetC202_1: C202.1 U8.D31 | length 1.3
  [1] Signal HS-H w0.021: U8.D31@50.93,20.917 50.93,20.571 51.375,20.126 C202.1@51.375,19.821
NetC237_2: C237.2 J3.A3 | length 1.1
  [1] Signal HS-H w0.09: J3.A3@16.2,41.6 16.18,41.58 16.18,40.97 16.3,40.85 C237.2@16.3,40.594
NetC238_2: C238.2 J3.A2 | length 1.1
  [1] Signal HS-H w0.09: J3.A2@16.7,41.6 16.7,40.912 C238.2@17.018,40.594
NetC239_2: C239.2 J3.B3 | length 0.9
  [1] Signal HS-H w0.09: J3.B3@12.95,42.95 12.993,42.993 v1(12.993,43.838)
NetC240_2: C240.2 J3.B2 | length 0.9
  [1] Signal HS-H w0.09: v1(12.319,43.845) 12.319,43.772 12.45,43.641 J3.B2@12.45,42.95
NetC252_2: C252.2 C253.2 R69.1 | length 1.5
  [10] Signal HS-V w0.09: C252.2@54.229,18.186 C253.2@55.042,18.186 55.747,18.186 R69.1@55.758,18.175
NetC264_2: C264.2 R90.1 Y3.3 | length 2.9
  [10] Signal HS-V w0.12: R90.1@62.325,12.358 62.325,12.348 62.862,11.811 63.586,11.811 C264.2@63.642,11.867 63.642,13.118 Y3.3@63.686,13.162
NetC269_1: C269.1 L3.1 U13.7 | length 5.3
  [1] Signal HS-H w0.2: L3.1@3.035,37.503 3.035,37.427 4.369,36.093 5.722,36.093 5.917,35.898 C269.1@6.129,35.898 6.5,36.269 6.776,36.269 6.995,36.05 7.044,36.05 U13.7@7.264,36.269
NetC269_2: C269.2 R96.2 | length 0.8
  [1] Signal HS-H w0.09: C269.2@5.555,35.323 R96.2@6.113,34.765
NetC273_2: C273.2 C274.2 C275.2 Q2.5 R98.2 U13.1 | length 8.5
  [1] Signal HS-H w0.2: C274.2@10.752,39.387 R98.2@10.193,38.829 10.206,38.829 10.724,38.311 C273.2@10.728,38.311 ; C275.2@11.295,38.895 11.295,38.883 10.736,38.324 C273.2@10.736,38.311 C273.2@10.728,38.311 ; Q2.5@14.246,35.591 13.061,36.776 10.744,36.776 U13.1@9.965,37.556 9.973,37.556 C273.2@10.728,38.311
NetC276_2: C276.2 Q2.4 R97.2 R99.2 | length 2.8
  [1] Signal HS-H w0.12: Q2.4@16.239,36.581 16.962,36.581 C276.2@17.348,36.195 R97.2@18.136,36.195 R99.2@18.923,36.195
NetC280_2: C280.2 R104.1 U13.9 | length 1.9
  [1] Signal HS-H w0.09: C280.2@7.806,34.222 7.806,34.247 R104.1@7.247,34.806 7.247,34.838 U13.9@7.971,35.562
NetC303_2: C303.2 R109.2 U17.2 | length 1.8
  [10] Signal HS-V w0.09: U17.2@20.44,26.905 21.117,26.228 C303.2@21.136,26.228 21.693,26.785 R109.2@21.697,26.785
NetC306_2: C306.2 R117.2 R118.1 R120.2 | length 2.7
  [10] Signal HS-V w0.09: C306.2@21.068,30.845 21.072,30.845 R120.2@21.629,30.288 ; R118.1@21.623,29.183 21.623,29.992 21.629,29.998 R120.2@21.629,30.288 ; R117.2@22.182,29.749 22.168,29.749 R120.2@21.629,30.288
NetC319_2: C319.2 C320.2 L9.1 U19.39 | length 7.1
  [1] Signal HS-H w0.12: U19.39@62.537,30.824 63.155,30.824 63.249,30.917 64.716,30.917 65.456,30.178 v3(65.456,29.439)
  [10] Signal HS-V w0.12: L9.1@65.43,29.111 65.632,29.111 66.192,28.551 C320.2@66.192,27.686 C319.2@66.192,26.467
NetC321_1: C321.1 R121.2 R122.1 U19.56 | length 4
  [1] Signal HS-H w0.09: U19.56@60.502,35.659 60.54,35.697 60.54,36.537 v1(60.579,36.576)
  [10] Signal HS-V w0.09: v1(60.579,36.576) 60.579,36.914 60.526,36.967 60.258,36.967 60.157,37.068 60.157,38.059 R121.2@60.325,38.227 60.78,38.682 60.882,38.682 R122.1@61.087,38.887
NetC322_2: C322.2 C323.2 L11.1 U19.29 | length 5.5
  [1] Signal HS-H w0.12: U19.29@60.152,28.789 60.147,28.784 60.147,26.596 L11.1@59.713,26.162 61.112,26.162 C323.2@61.189,26.238 C322.2@62.408,26.238